# Altium PCB PCB1.PcbDoc
Units mm, origin at the board's own origin, x right, y up, seen from the top; angles counter-clockwise.
Board outline 71.12 x 58.42 mm, 2 copper layers (Top Layer, Bottom Layer); 35 components, 34 nets, 153 pads, 108 vias.
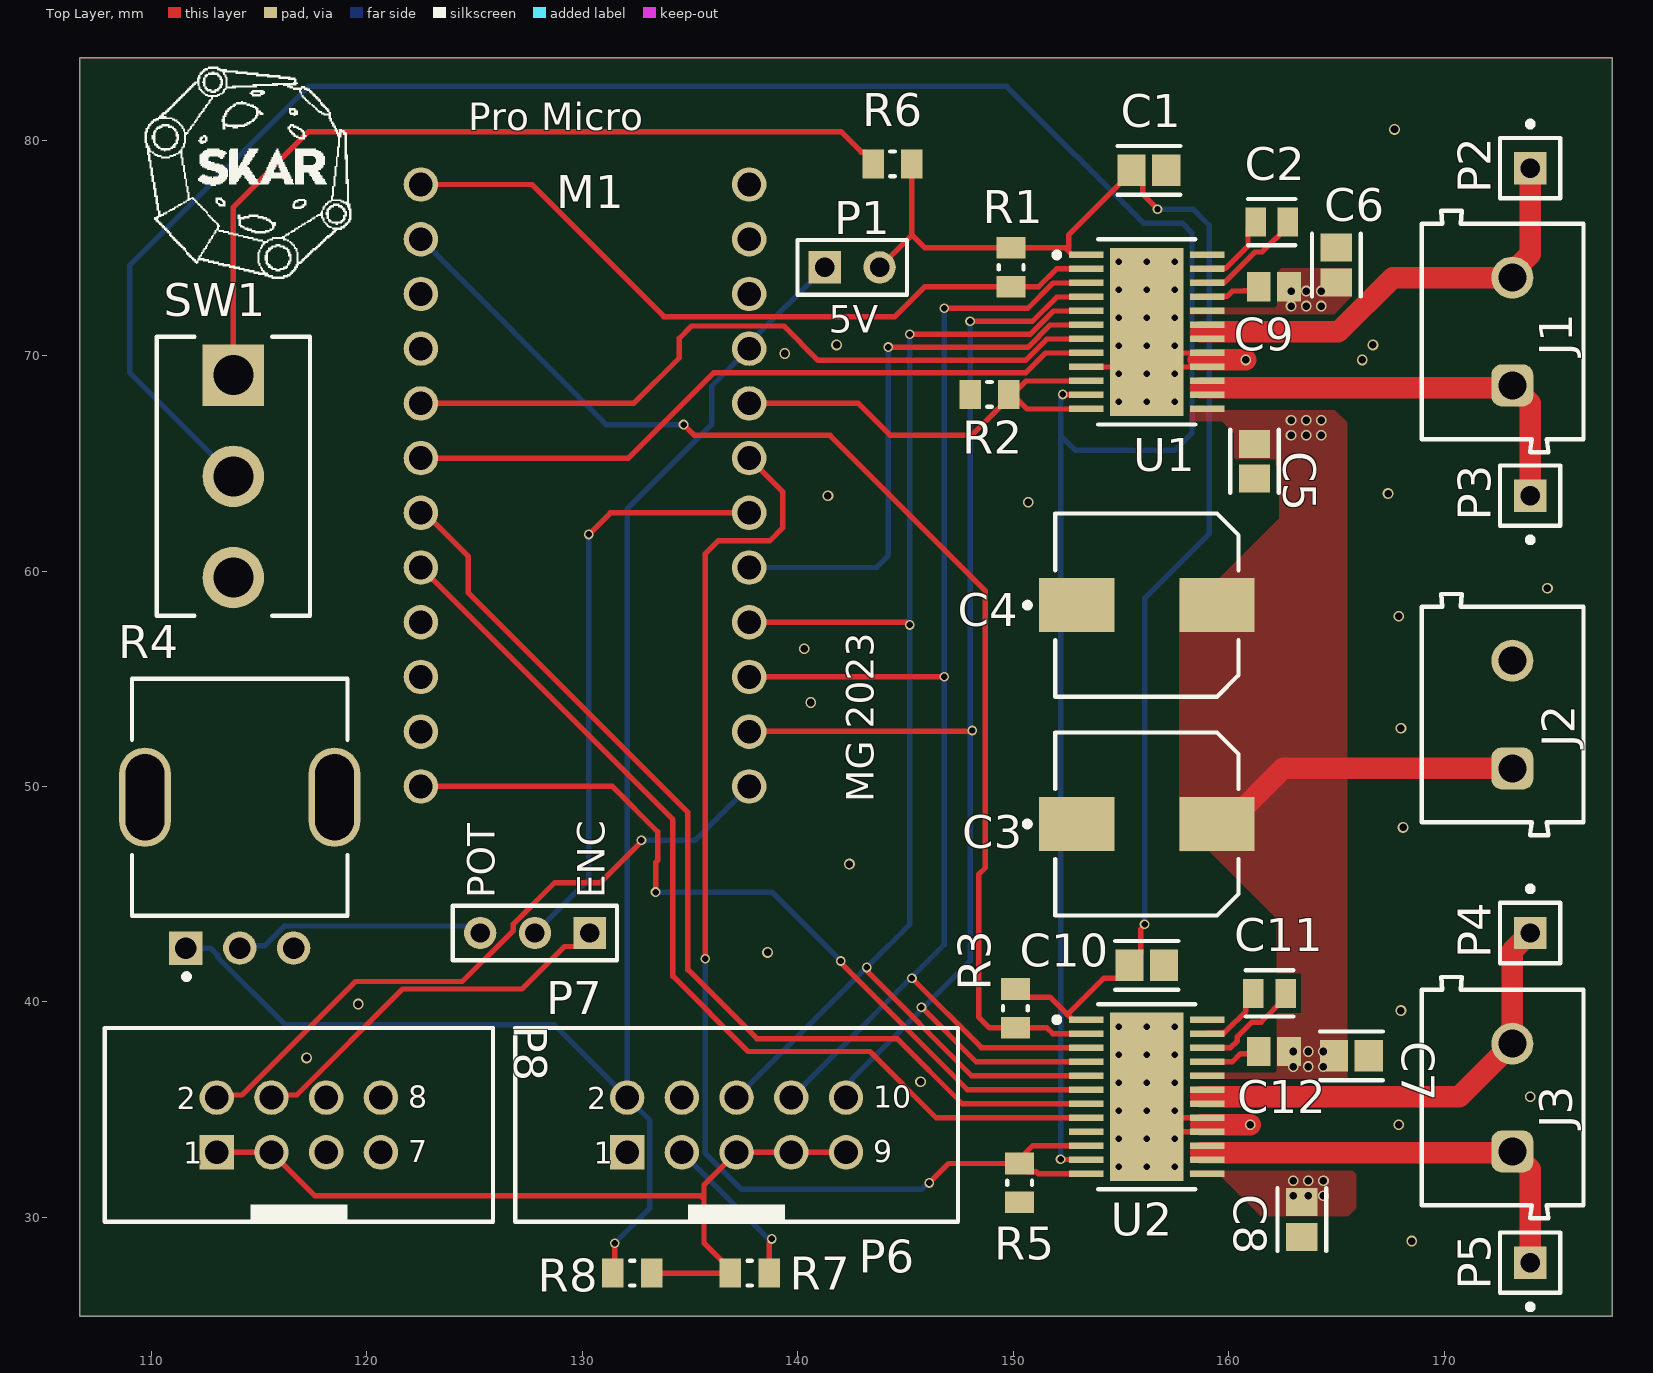
[diagram p0: Top Layer view]
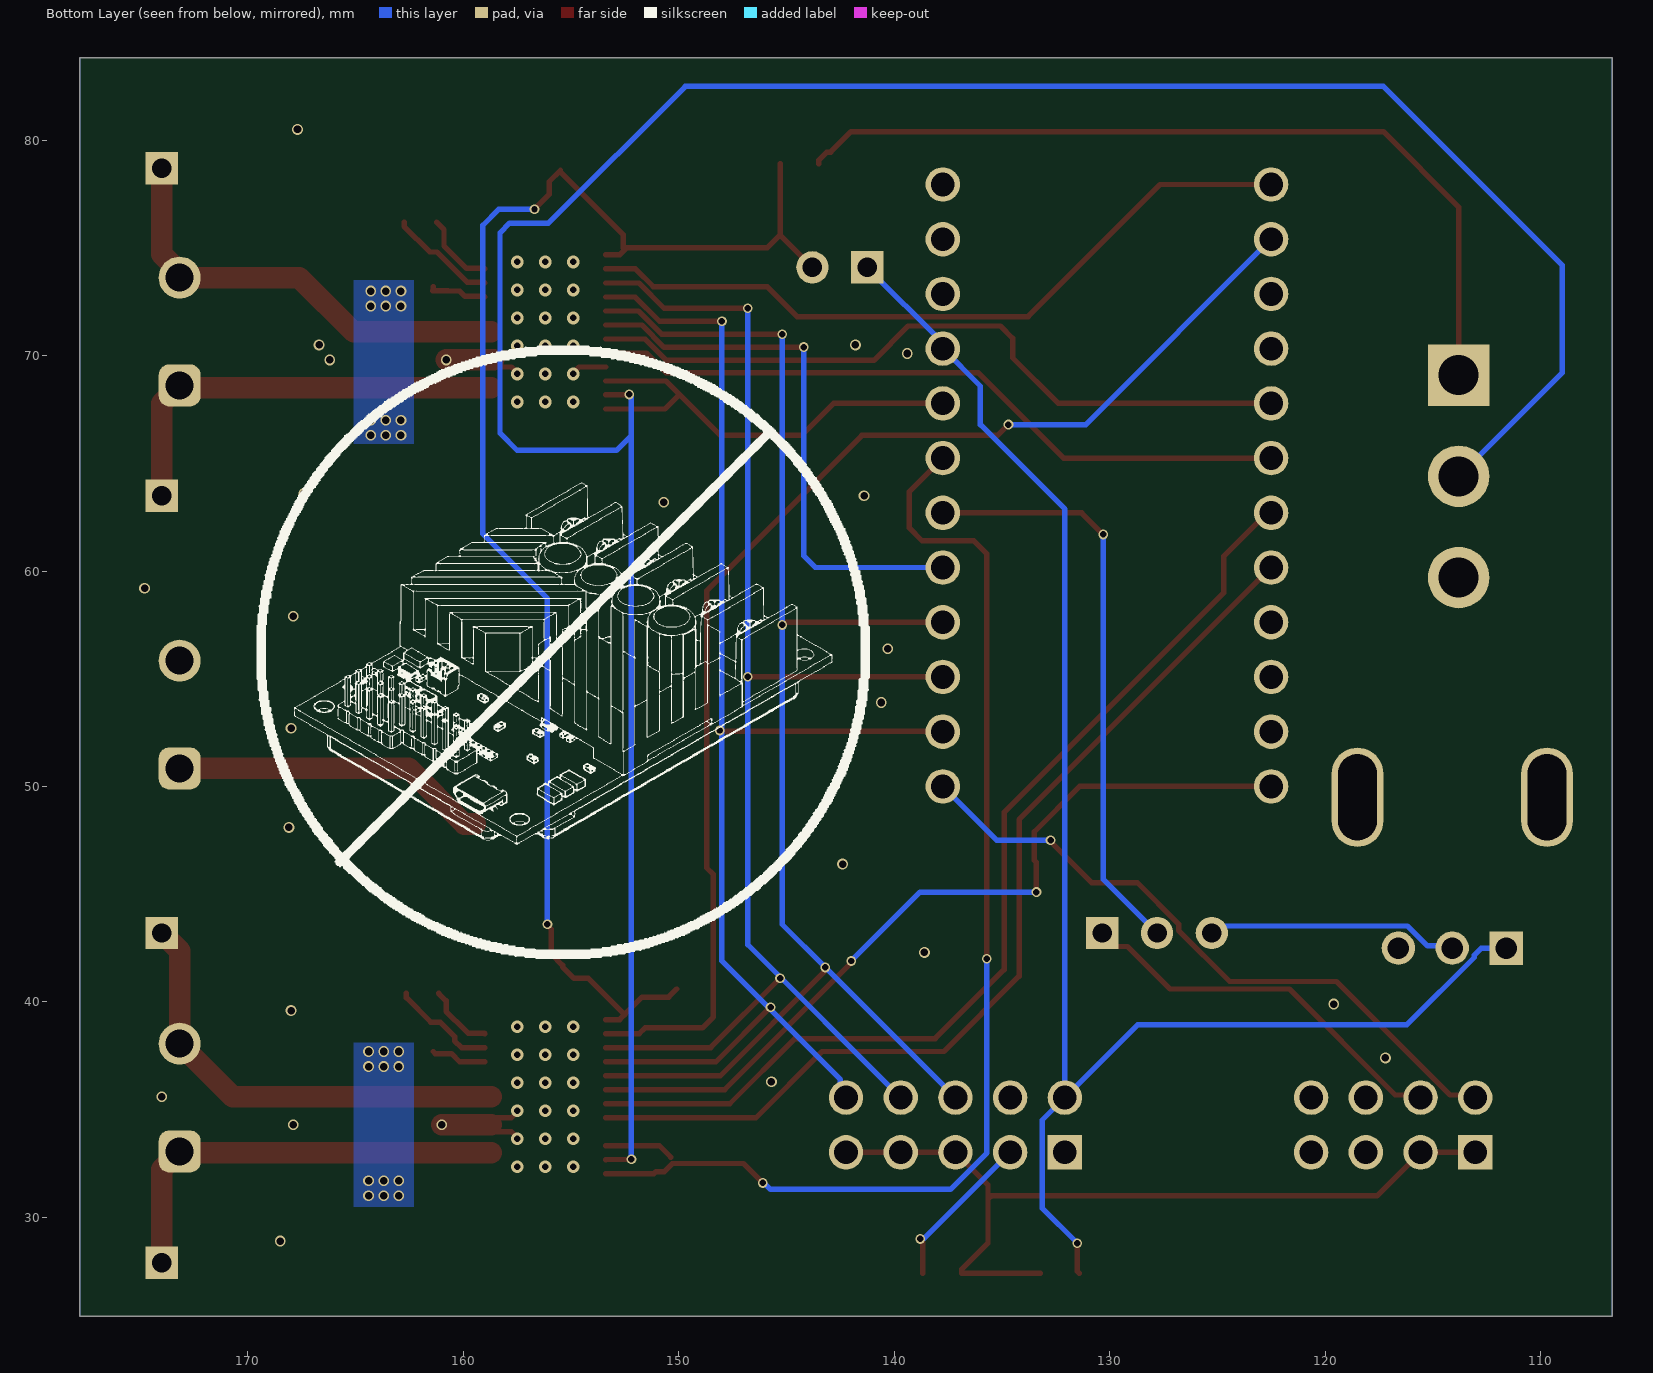
[diagram p1: Bottom Layer view, seen from below]
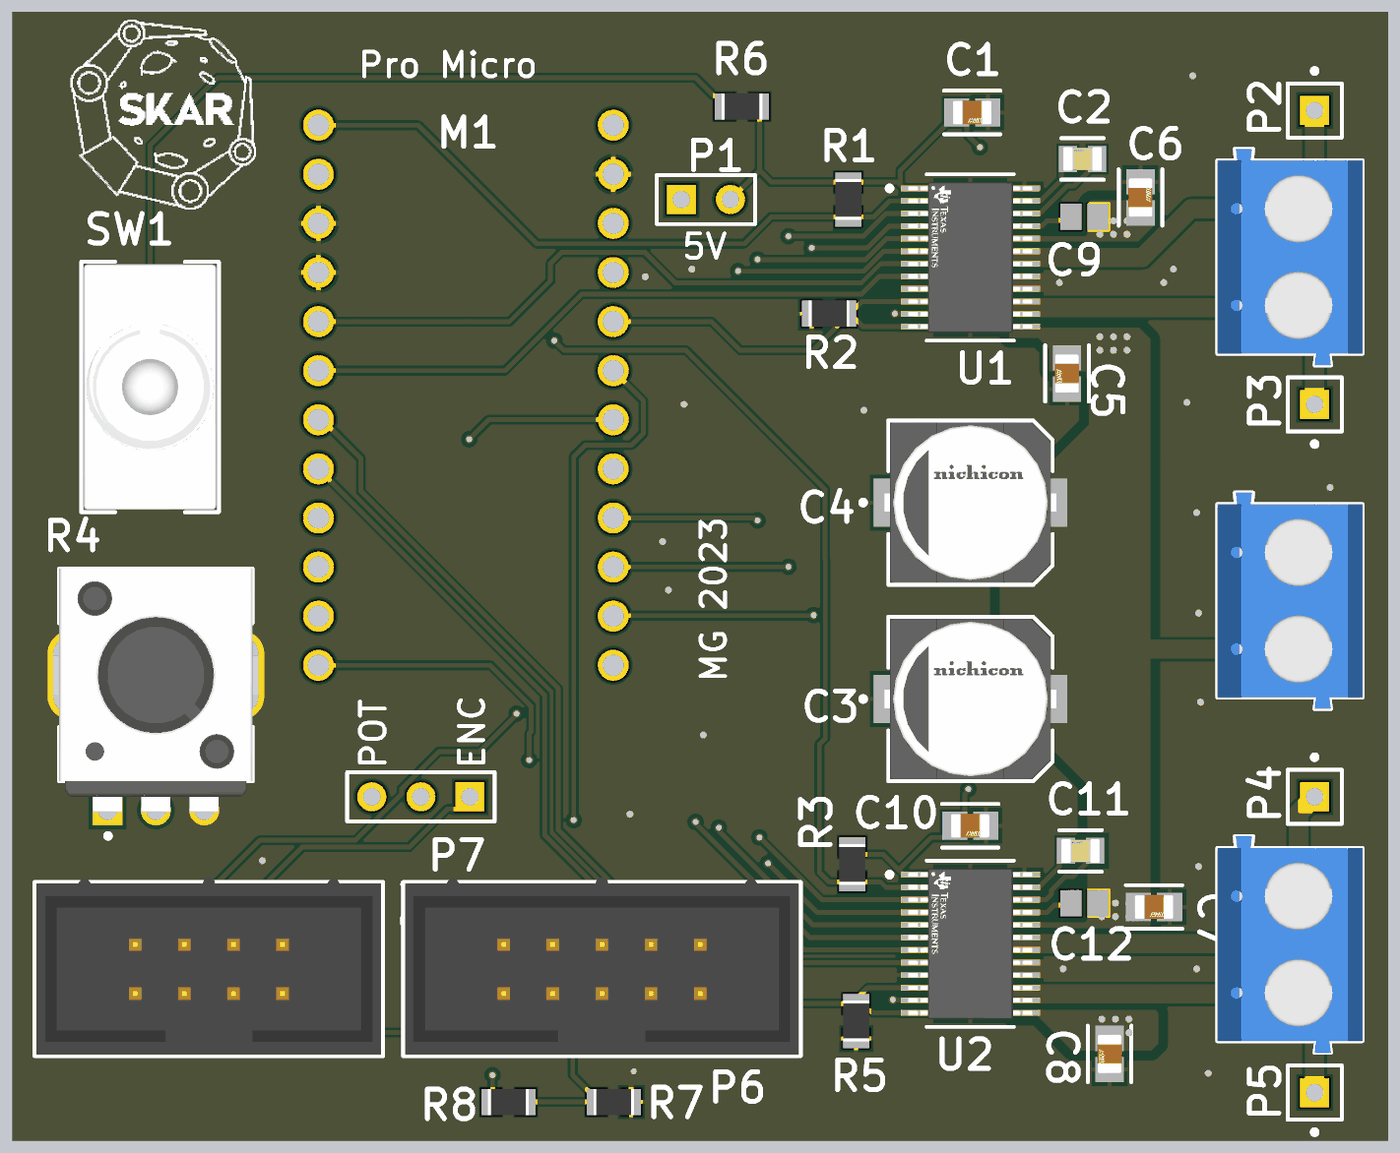
[diagram p2: 3D render of the assembled board from above, using the file's embedded part models]

## Layer stack, top to bottom
Top Solder: solder mask 0.0102, Solder Resist, Dk 3.5
Top Layer: signal copper 0.0356
Dielectric 1: dielectric 0.32, FR-4, Dk 4.8
Bottom Layer: signal copper 0.0356
Bottom Solder: solder mask 0.0102, Solder Resist, Dk 3.5

## Board outline
106.68,25.4 106.68,83.82 177.8,83.82 177.8,25.4

## Design rules (kind name [scope] priority, off if disabled: settings)
Clearance Clearance_POWER [(InNet('NetC205_2') OR InNet('NETC203_2') OR InNet('NETC206_2') OR InNet('NetP410_1') OR InNet('NetP410_3') OR InNet('VM'))] p1: gap=0.254 ignorepadtopadclearanceinfootprint=FALSE except(0: SMDPad-Hole THPad-Hole Via-Hole Fill-Hole Poly-Hole Region-Hole Text-Hole; 0.1: Arc-Arc Arc-Track Track-Track; 0.127: Arc-THPad Arc-Fill Arc-Poly Arc-Region Track-THPad Track-Fill Track-Poly Track-Region SMDPad-SMDPad; 0.2: Arc-SMDPad Track-SMDPad; 0.5: THPad-THPad THPad-Fill THPad-Poly THPad-Region Fill-Fill Fill-Poly Fill-Region Poly-Poly Poly-Region Region-Region)
Clearance [All] p2: gap=0.127 ignorepadtopadclearanceinfootprint=FALSE except(0: SMDPad-Hole THPad-Hole Via-Hole Fill-Hole Poly-Hole Region-Hole Text-Hole; 0.1: Arc-Arc Arc-Track Track-Track; 0.2: Arc-SMDPad Track-SMDPad THPad-Fill THPad-Poly THPad-Region Via-Fill Via-Poly Via-Region; 0.254: Arc-Via Arc-Text Arc-Hole Track-Via Track-Text Track-Hole SMDPad-THPad SMDPad-Via SMDPad-Text THPad-Via THPad-Text Via-Via Via-Text Fill-Text Poly-Text Region-Text Text-Text; 0.5: THPad-THPad)
ComponentClearance [All] p1: gap=0.127 collisioncheckmode=3 verticalgap=0.254 showdistances=FALSE
HoleSize [All] p1: absolutevalues=TRUE maxlimit=6.5 minlimit=0.025 maxpercent=80.000 minpercent=20.000
MinimumSolderMaskSliver [All] p1: minsoldermaskwidth=0.08
PlaneClearance [All] p1: clearance=0.2
PlaneConnect [All] p1: planeconnectstyle=Direct reliefexpansion=0.508 reliefentries=4 reliefconductorwidth=0.254 reliefairgap=0.254
PolygonConnect PolygonConnect_GND_POWER [InNet('GND') vs (HasFootprint('FP-FC-G-MFG') OR HasFootprint('FP-CL32-IPC_B') OR HasFootprint('TSON Advance_TOS') OR HasFootprint('XT60+MR60') OR HasFootprint('XT-60') OR HasFootprint('FP-SMAJ-CA-MFG') OR InNamedPolygon('NONET_L01_P005'))] p1: connectstyle=Direct reliefconductorwidth=0.254 reliefentries=4 polygonreliefangle="90 Angle" airgapwidth=0.254
PolygonConnect PolygonConnect_GND [InNet('GND')] p2: thpad.connectstyle=Direct thpad.reliefconductorwidth=0.254 thpad.reliefentries=4 thpad.polygonreliefangle="90 Angle" thpad.airgapwidth=0.254 smdpad.connectstyle=Relief smdpad.reliefconductorwidth=0.2 smdpad.reliefentries=4 smdpad.polygonreliefangle="90 Angle" smdpad.airgapwidth=0.2 via.connectstyle=Direct via.reliefconductorwidth=0.254 via.reliefentries=4 via.polygonreliefangle="90 Angle" via.airgapwidth=0.254
PolygonConnect [All] p3: connectstyle=Direct reliefconductorwidth=0.254 reliefentries=4 polygonreliefangle="90 Angle" airgapwidth=0.254
RoutingVias [All] p1: holewidth=0.3 width=0.45 viastyle="Through Hole" minholewidth=0.3 minwidth=0.45 maxholewidth=0.55 maxwidth=0.7
SilkToSilkClearance [All] p1: silktosilkclearance=0
SilkToSolderMaskClearance [IsPad] p1: minsilkscreentomaskgap=0.15 clearancetoexposedcopper=TRUE
SolderMaskExpansion [All] p1: expansion=0.1 istentingtop=FALSE
Width Width_voltage [InNetClass('Voltage')] p1: maxlimit=0.5 minlimit=0.18 preferedwidth=0.18 minimp=50.000000 maximp=50.000000 favimp=50.000000
Width [All] p2: maxlimit=1 minlimit=0.127 preferedwidth=0.25 minimp=50.000000 maximp=50.000000 favimp=50.000000
23 further rules are at their usual default settings.

## Components (designator, comment, footprint, x,y, rotation, side; value= is the part's Value field where it differs from the comment)
C1 "100nF" FP-0805-L_2_01_0_2-W_1_25-IPC_B 156.3,78.6 r0 top
C2 "47nF" FP-C0805C-DN-MFG 162,76.2 r0 top value="47,000 pF"
C3 "220uF" FP-UWT1V221MNL1GS-MFG 156.21,48.26 r0 top
C4 "220uF" FP-UWT1V221MNL1GS-MFG 156.21,58.42 r0 top
C5 "100nF" FP-0805-L_2_01_0_2-W_1_25-IPC_B 161.2,65.1 r270 top
C6 "100nF" FP-0805-L_2_01_0_2-W_1_25-IPC_B 165,74.206 r90 top
C7 "100nF" FP-0805-L_2_01_0_2-W_1_25-IPC_B 165.7,37.5 r0 top
C8 "100nF" FP-0805-L_2_01_0_2-W_1_25-IPC_B 163.4,29.9 r270 top
C9 "1uF" CAPC2013X145X50LL20T25 162.1,73.2 r0 top
C10 "100nF" FP-0805-L_2_01_0_2-W_1_25-IPC_B 156.2,41.7 r0 top
C11 "47nF" FP-C0805C-DN-MFG 161.9,40.4 r0 top value="47,000 pF"
C12 "1uF" CAPC2013X145X50LL20T25 162.1,37.7 r0 top
J1 "OUT 1" 691102710002 172.72,71.12 r90 top
J2 "POWER" 691102710002 172.72,53.34 r90 top
J3 "OUT 2" 691102710002 172.72,35.56 r90 top
M1 "Arduino + CAN" PCBComponent_1 130.1,66.1 r0 top
P1 "Header 2" HDR1X2 141.26,74.1 r0 top
P2 "Plug" PIN1 174,78.7 r0 top
P3 "Plug" PIN1 174,63.5 r180 top
P4 "Plug" PIN1 174,43.2 r0 top
P5 "Plug" PIN1 174,27.9 r180 top
P6 "61201021621" 61201021621 137.16,34.29 r0 top
P7 "Header 3" HDR1X3 130.34,43.2 r180 top
P8 "61200821621" 61200821621 116.84,34.29 r0 top
R1 "10k" RESC2013X60X35NL10T20 149.9,74.1 r90 top
R2 "680" RESC2013X60X35NL10T20 148.9,68.2 r0 top
R3 "10k" RESC2013X60X35NL10T20 150.1,39.7 r90 top
R4 "PTV09A-4225F-B103" FP-PTV09A-4-MFG 114.1,49.5 r0 top
R5 "680" RESC2013X60X35NL10T20 150.3,31.6 r90 top
R6 "10k" RESC2013X60X35NL10T20 144.4,78.9 r0 top
R7 "10k" RESC2013X60X35NL10T20 137.77,27.41 r0 top
R8 "10k" RESC2013X60X35NL10T20 132.32,27.41 r0 top
SW1 "A101SYCB04" FP-A101SYCB04-MFG 113.8,64.4 r0 top
U1 "DRV8873SPWPRQ1" FP-PWP0024J-MFG 156.2,71.1 r0 top
U2 "DRV8873SPWPRQ1" FP-PWP0024J-MFG 156.2,35.6 r0 top

## Footprints (in the part's own frame and the unit in brackets; to place one, negate y for a bottom-side part, rotate by r counter-clockwise, add the part's x,y. Pads: shape width x height; smd on the part's side, far side on the other; paste and mask are expansions set on the pad)
61200821621 [mm] "8 pins, straight, gold plating"
  rect 1.6x1.6 hole 1.1: 1(-3.81,-1.27)
  round 1.6 hole 1.1: 2(-3.81,1.27) 3(-1.27,-1.27) 4(-1.27,1.27) 5(1.27,-1.27) 6(1.27,1.27) 7(3.81,-1.27) 8(3.81,1.27)
  silkscreen extent -9.01,-4.5 9.01,4.5, body extent -8.91,-4.42 8.91,4.75, height 9.13
61201021621 [mm] "10 pins, straight, gold plating"
  rect 1.6x1.6 hole 1.1: 1(-5.08,-1.27)
  round 1.6 hole 1.1: 2(-5.08,1.27) 3(-2.54,-1.27) 4(-2.54,1.27) 5(0,-1.27) 6(0,1.27) 7(2.54,-1.27) 8(2.54,1.27) 9(5.08,-1.27) 10(5.08,1.27)
  silkscreen extent -10.28,-4.5 10.28,4.5, body extent -10.18,-4.42 10.18,4.75, height 9.13
691102710002 [mm] "5,00mm - modular - blue - Horizontal entry with pressure clamp - 9,9 mm height - 02p"
  rrect50% 1.95x1.95 hole 1.3: 1(-2.5,-0.45)
  round 1.95 hole 1.3: 2(2.5,-0.45)
  silkscreen extent -5.6,-3.75 5.6,3.75, body extent -5.6,-3.75 5.6,3.75, height 9.96
CAPC2013X145X50LL20T25 [mm] "Chip Capacitor, 2-Leads, Body 2.00x1.25mm, IPC High Density"
  rect 1.1x1.35 smd: 1(-0.7,0) 2(0.7,0)
  body extent -1.1,-0.72 1.1,0.72, height 1.45
FP-0805-L_2_01_0_2-W_1_25-IPC_B [mm]
  rect 1.305x1.456 smd paste+0 mask+0: 1(-0.806,0) 2(0.806,0)
  silkscreen extent -1.46,-1.13 1.46,1.13, body extent -1.71,-0.98 1.71,0.98, height 0.25
FP-A101SYCB04-MFG [mil]
  rect 112.37x112.37 hole 73 paste-99999 mask+0: 1(0,185)
  round 112.37 hole 73 paste-99999 mask+0: 2(0,0) 3(0,-185)
  silkscreen extent -140,-255 140,255, body extent -144,-259 144,259, height 10
FP-C0805C-DN-MFG [mm]
  rect 0.95x1.35 smd paste+0 mask+0: 1(-0.75,0) 2(0.75,0)
  silkscreen extent -1.1,-1.07 1.1,1.07, body extent -1.4,-0.85 1.4,0.85, height 0.25
FP-PTV09A-4-MFG [mm]
  rect 1.55x1.55 hole 1 paste-2539.97 mask+0: 1(-2.5,-7)
  round 1.55 hole 1 paste-2539.97 mask+0: 2(0,-7) 3(2.5,-7)
  rrect100% 2.4x4.6 hole 4 slot 1.8 at 0 deg paste-2539.97 mask+0: 4(-4.4,0) 5(4.4,0)
  silkscreen extent -5,-8.45 5,5.5, body extent -5.8,-7.88 5.8,5.6, height 0.25
FP-PWP0024J-MFG [mm]
  rect 1.6x0.3 smd paste-1000 mask+0: 1(-2.8,3.575) 2(-2.8,2.925) 3(-2.8,2.275) 4(-2.8,1.625) 5(-2.8,0.975) 6(-2.8,0.325) 7(-2.8,-0.325) 8(-2.8,-0.975) 9(-2.8,-1.625) 10(-2.8,-2.275) 11(-2.8,-2.925) 12(-2.8,-3.575) 13(2.8,-3.575) 14(2.8,-2.925) 15(2.8,-2.275) 16(2.8,-1.625) 17(2.8,-0.975) 18(2.8,-0.325) 19(2.8,0.325) 20(2.8,0.975) 21(2.8,1.625) 22(2.8,2.275) 23(2.8,2.925) 24(2.8,3.575)
  rect 3.4x7.8 smd paste-1000 mask-1000: 25(0,0)
  silkscreen extent -4.3,-4.3 2.25,4.3, body extent -3.7,-4.2 3.7,4.2, height 0.25
FP-UWT1V221MNL1GS-MFG [mm]
  rect 3.5x2.5 smd paste+0 mask+0: 1(-3.25,0) 2(3.25,0)
  silkscreen extent -5.67,-4.25 4.25,4.25, body extent -5.25,-4.5 5.25,4.5, height 0.25
HDR1X2 [mm] "Connector; Header; 2 Position"
  rect 1.5x1.5 hole 0.9: 1(0,0)
  round 1.5 hole 0.9: 2(2.54,0)
  silkscreen extent -1.27,-1.27 3.81,1.27
HDR1X3 [mm] "Connector; Header; 3 Position"
  rect 1.5x1.5 hole 0.9: 1(0,0)
  round 1.5 hole 0.9: 2(2.54,0) 3(5.08,0)
  silkscreen extent -1.27,-1.27 6.35,1.27
PCBComponent_1 [mm]
  round 1.6 hole 1.1 paste-2539.97: 1(-7.595,11.845) 2(-7.595,9.305) 3(-7.595,6.765) 4(-7.595,4.225) 5(-7.595,1.685) 6(-7.595,-0.855) 7(-7.595,-3.395) 8(-7.595,-5.935) 9(-7.595,-8.475) 10(-7.595,-11.015) 11(-7.595,-13.555) 12(-7.595,-16.095) 13(7.645,-16.095) 14(7.645,-13.555) 15(7.645,-11.015) 16(7.645,-8.475) 17(7.645,-5.935) 18(7.645,-3.395) 19(7.645,-0.855) 20(7.645,1.685) 21(7.645,4.225) 22(7.645,6.765) 23(7.645,9.305) 24(7.645,11.845)
PIN1 [mm] "Connector; Plug"
  rect 1.5x1.5 hole 0.9: 1(0,0)
  silkscreen extent -1.4,-1.4 1.4,2.17
RESC2013X60X35NL10T20 [mm] "Chip Resistor, 2-Leads, Body 2.1x1.35mm, IPC Medium Density"
  rect 1x1.35 smd: 1(-0.9,0) 2(0.9,0)
  silkscreen extent -0.1,-0.58 0.1,0.57, body extent -1.05,-0.68 1.05,0.67, height 0.6

## Part data
C1 C5 C6 C7 C8 C10: library part CMP-2007-04174-2, "General Purpose Ceramic Capacitor, 0805, 100nF, 10%, X7R, 15%, 100V", Case Code (Imperial)=0805, Case Code (Metric)=2012, Dielectric=X7R, Dielectric Material=Ceramic, Max Operating Temperature=125°C, Min Operating Temperature=-55°C, Package Quantity=2000, Tolerance=10%, Voltage=100V, Capacitance=100nF, Case/Package=0805, Construction=Flat, Contact Plating=Tin, Depth=1.25mm, Height=1.4mm, Lead Free="Lead Free", Length=2.01mm, Mount="Surface Mount", Number of Pins=2, Packaging="Tape and Reel", Radiation Hardening=No, REACH SVHC="No SVHC", RoHS Compliant=Yes, Series=-, Termination=SMD/SMT, Thickness=0.055inch, Voltage Rating=100V, Voltage Rating (DC)=100V, Width=0.049inch
C2 C11: library part CMP-2007-01098-2, "CAP CER 0.047UF 50V X7R 0805", Capacitance="47,000 pF", Manufacturer=KEMET, Manufacturer Part Number=C0805C473K5RACTU, Package=C0805C-DN, Temperature="-55°C to +125°C", Temperature Characteristic=X7R, Temperature Coefficient=30ppm/°C, Temperature Range High=+125°C, Temperature Range Low=-55°C, Tolerance=0.1, Voltage Rating="50 V", Automotive=No, Category=Cap, ComponentLink2Description=Datasheet, ComponentLink2URL=https://content.kemet.com/datasheets/KEM_C1003_C0G_SMD.pdf, Device Class L1="Passive Components", Device Class L2=Capacitors, Device Class L3="Ceramic Capacitors", Digikey Description="CAP CER 0.047UF 50V X7R 0805", Height=0.88mm, Ipc Land Pattern Name=CAPC200125X78, Lead Free=Yes, Material=Ceramic, Mouser Description="Capacitor; Ceramic; Cap 0.047 uF; Tol 10%; Vol-Rtg 50 VDC; SMT; 0805; X7R; Tape&Reel", Octopart=https://octopart.com/c0805c473k5ractu-kemet-138387, RoHS=TRUE
C3 C4: library part CMP-12462-000057-1, "CAP ALUM 220UF 20% 35V SMD", Case/Package=Radial, Dielectric Material=Aluminium, Leakage Current=3uA, Max Operating Temperature=105°C, Min Operating Temperature=-55°C, Package Quantity=500, Ripple Current=190mA, Tolerance=20%, Voltage=35V, Capacitance=220uF, Construction=Cylindrical, Diameter=8mm, Dissipation Factor=0.14%, Height=10mm, Height - Seated (Max)=0.394inch, Lead Diameter=1.1mm, Lead Free="Lead Free", Lead Pitch=0.327inch, Length=10mm, Life (Hours)=1000Hour, Mount="Surface Mount", Number of Pins=2, Packaging="Tape and Reel", Radiation Hardening=No, REACH SVHC="No SVHC", Ripple Current (AC)=190mA, RoHS Compliant=Yes, Series=WT, Termination=SMD/SMT, Voltage Rating=35V, Voltage Rating (DC)=35V
C9 C12: library part CMP-1036-04746-2, Manufacturer=Kemet, Part Number=C0805C105K4PACTU
J1 J2 J3: library part CMP-1502-03258-2, Color=Blue, Current=15A, Max Operating Temperature=105°C, Min Operating Temperature=-40°C, Voltage=300V, Contact Material=Brass, Contact Plating=Tin, Current Rating=15A, Height=13.4mm, Housing Material=Nylon, Lead Pitch=5mm, Length=7.5mm, Mount="Through Hole", NexarPartId=8917706, Number of Contacts=2, Number of Levels=1, Number of Pins=2, Number of Positions Per Level=2, Packaging=Box, Pitch=5.0038mm, Plating=Steel, REACH SVHC=Unknown, RoHS=Compliant, Stripping Length=-6mm, Termination=Screw, Voltage Rating=300V, Width=11.2mm, Wire Gauge (Max)=22AWG, Wire Gauge (Min)=14AWG, Wire/Cable Gauge=22AWG
M1: library part Arduino, "Arduino Pro Micro + CAN Shield"
P1: "Header, 2-Pin", LatestRevisionDate=17-Jul-2002, LatestRevisionNote="Re-released for DXP Platform.", Publisher="Altium Limited"
P6: library part CMP-1502-00007-1, "Male Box Header WR-BHD, THT, Vertical, pitch 2.54 mm, 10 pins", Contact Resistance=20mOhm, Manufacturer="Wurth Elektronik", Operating Temperature=-40to125degC, Withstanding Voltage=500VAC, Working Voltage=250VAC, Datasheet URL=https://katalog.we-online.de/em/datasheet/6120xx21621.pdf, Gender=Male, Manufacturer URL=http://www.we-online.de, Mounting Technology=THT, Orientation=Vertical, Package Reference=61201021621, Packaging=Tray, Part Number=61201021621, Pin Number=10, Pitch=2.54mm, Published Date=August2018, Publisher=WurthElektronik
P7: "Header, 3-Pin", LatestRevisionDate=17-Jul-2002, LatestRevisionNote="Re-released for DXP Platform.", Publisher="Altium Limited"
P8: library part CMP-1502-00006-1, "Male Box Header WR-BHD, THT, Vertical, pitch 2.54 mm, 8 pins", Contact Resistance=20mOhm, Manufacturer="Wurth Elektronik", Operating Temperature=-40to125degC, Withstanding Voltage=500VAC, Working Voltage=250VAC, Datasheet URL=https://katalog.we-online.de/em/datasheet/6120xx21621.pdf, Gender=Male, Manufacturer URL=http://www.we-online.de, Mounting Technology=THT, Orientation=Vertical, Package Reference=61200821621, Packaging=Tray, Part Number=61200821621, Pin Number=8, Pitch=2.54mm, Published Date=August2018, Publisher=WurthElektronik
R1 R2 R3 R5 R6 R7 R8: library part CMP-1659-00013-4, "Chip Resistor, 10 KOhm, +/- 1%, 0.125 W, -55 to 155 degC, 0805 (2012 Metric), RoHS, Tape and Reel", Manufacturer=Yageo, Max Operating Temperature="155 degC", Min Operating Temperature="-55 degC", Package Quantity=5000, Voltage Rating="150 V", ComponentLink1Description="Manufacturer URL", ComponentLink1URL=http://www.yageo.com/, ComponentLink2Description=Datasheet, ComponentLink2URL=http://www.yageo.com/documents/recent/PYu-RC_Group_51_RoHS_L_04.pdf, DatasheetVersion="Rev. 4, 02/2016", Height="0.5 mm", Length="2 mm", Mount="Surface Mount", Mounting Technology="Surface Mount", PackageDescription="2-Pin Surface Mounted Device, Body 2 x 1.25 mm", PackageReference=0805, Packaging="Tape and Reel", Pins=2, REACH SVHC="No SVHC", RoHSCompliant=true
R4: library part CMP-07234-000052-1, "POT 10K OHM 1/20W CARBON LINEAR", Max Operating Temperature=50°C, Max Power Dissipation=50mW, Min Operating Temperature=-10°C, Package Quantity=100, Resistance=10kR, Resistance Tolerance=20%, Resistor Type=Carbon, Actuator Diameter=0.236inch, Actuator Length=0.984inch, Depth=12.5mm, Height=12.5mm, Hole Diameter=9.1mm, Length=11.4mm, Military Standard=Not, Mount="Through Hole", Number of Gangs=1, Number of Turns=1, Packaging=Bulk, Power Rating=50mW, Radiation Hardening=No, REACH SVHC="No SVHC", RoHS Compliant=Yes, Series="Pro Audio PTV09", Taper=Linear, Technology="CARBON FILM", Termination=PCB, Tolerance=20%, Type=Potentiometer
SW1: library part CMP-03408-000017-1, "SWITCH TOGGLE SPDT 0.4VA 20V", Actuator Color=Chrome, Contact Current Rating=400mA, Contact Resistance=10mR, Flammability Rating="UL94 V-1", Insulation Resistance=30MR, Max Operating Temperature=85°C, Max Voltage Rating (AC)=20V, Min Operating Temperature=-30°C, Package Quantity=100, Power Rating=400mW, Actuator Length=10.41mm, Actuator Material=Phenolic, Actuator Type="Standard Round", Contact Material=Copper, Contact Plating=Gold, Depth=6.86mm, Electrical Life=6000Cycles, ELV=Compliant, Illumination Type=Non-Illuminated, Lead Free="Lead Free", Max Voltage Rating (DC)=20V, Mount=Panel, Number of Poles=1, Number of Positions=2, Orientation=Straight, Packaging=Bulk, Radiation Hardening=No, REACH SVHC="No SVHC", RoHS Compliant=Yes, Series="Gemini A", Switch Function=On-On, Termination="PC Pins", Throw Configuration=SPDT, Voltage Rating (AC)=20V, Voltage Rating (DC)=20V
U1 U2: library part CMP-04915-000063-1, "IC MTRDRV UNIPLR 0-5.5V 24HTSSOP", Max Operating Temperature=125°C, Min Operating Temperature=-40°C, Output Current=10mA, Interface=SPI, Logic Function="AND GATE", Mount="Surface Mount", Packaging="Cut Tape", RoHS Compliant=Yes
P2 P3 P4 P5: LatestRevisionDate=17-Jul-2002, LatestRevisionNote="Re-released for DXP Platform.", Publisher="Altium Limited"

## Via types
v1: diameter 0.5, hole 0.35, Top Layer to Bottom Layer, tented both sides, 49 vias
v2: diameter 0.6, hole 0.3, Top Layer to Bottom Layer, 36 vias
v3: diameter 0.45, hole 0.3, Top Layer to Bottom Layer, tented both sides, 23 vias

## Nets (pads, with @x,y where several pads share a name; then routed paths per layer and width w, separated by ;. In a path a pad name is that pad's centre, name@x,y a point inside that pad or via, vN(x,y) a via of type N, cw(c..) or ccw(c..) an arc to the next point about the centre after c; other vN are vias at no path point)
+5: M1.21 P1.1 P6.2 R4.1 R8.1 | length 75.1
  Top Layer w0.25: R8.1 131.5,27.49 v3(131.5,28.8)
  Bottom Layer w0.25: R4.1 112.75,42.5 113.073,42.177 113.073,42.075 116.201,38.946 128.694,38.946 P6.2 ; v3(131.5,28.8) 133.132,30.432 133.132,34.508 P6.2 ; P1.1 137.745,70.585 M1.21 136,68.58 136,66.8 132.08,62.88 P6.2
CS1: M1.17 U1.6 | length 26
  Top Layer w0.25: v3(144.2,70.4) 144.212,70.388 150.678,70.388 151.715,71.425 U1.6
  Bottom Layer w0.25: M1.17 143.665,60.165 144.2,60.7 v3(144.2,70.4)
CS2: M1.12 U2.6 | length 38.5
  Top Layer w0.25: M1.12 131.395,50.005 133.5,47.9 133.5,46.577 133.4,46.477 v3(133.4,45.1) ; v3@142,41.8 147.875,35.925 U2.6
  Bottom Layer w0.25: v3(133.4,45.1) 138.8,45.1 v3(142,41.9)
CS3: M1.13 P8.2 | length 30.9
  Top Layer w0.25: P8.2 113.153,35.683 114.205,35.683 119.472,40.95 124.427,40.95 126.798,43.321 126.798,43.615 128.721,45.538 130.838,45.538 132.746,47.446 v3(132.746,47.5)
  Bottom Layer w0.25: v3(132.746,47.5) 135.24,47.5 M1.13
CS4: P7.1 P8.4 | length 17.9
  Top Layer w0.25: P8.4 115.693,35.683 116.745,35.683 121.662,40.6 127.2,40.6 129.175,42.575 129.715,42.575 P7.1
GND: C1.2 C3.1 C4.1 C5.2 C6.2 C7.2 C8.2 C10.2 J2.2 M1.3 M1.4 M1.23 P6.3 R2.1 R4.3 R4.4 R4.5 R5.1 R7.2 SW1.3 U1.9 U1.16 U1.17 U1.24 U1.25 U2.9 U2.16 U2.17 U2.24 U2.25 | length 19.3
  Top Layer w0.25: R7.2 138.67,28.816 138.8,28.946 v3(138.8,29) ; U1.9 154.625,69.475 154.9,69.2 v2(154.9,69.15) ; v2(157.5,33.65) 157.5,33.7 157.775,33.975 U2.16 ; v2(157.5,34.95) 157.5,34.9 157.775,34.625 U2.17 ; v2(157.5,69.15) 157.5,69.2 157.775,69.475 U1.16@158.6,69.475 ; v2(157.5,70.45) 157.5,70.4 157.775,70.125 U1.17@158.6,70.125
  Top Layer w1: 158.6,69.8 v1(160.8,69.8) ; 158.7,34.3 v1(161,34.3)
  Bottom Layer w0.25: P6.3 v3@138.602,29.038
  other v1: 168.5,28.9 167.9,34.3 174,35.6 145.7,36.3 117.2,37.4 168,39.6 119.6,39.9 138.6,42.3 142.4,46.4 168.1,48.1 168,52.7 140.6,53.9 140.3,56.4 167.9,57.9 174.8,59.2 150.7,63.2 141.4,63.5 167.4,63.6 166.2,69.8 139.4,70.1 141.8,70.5 166.7,70.5 167.7,80.5
  other v2: 154.9,32.35 156.2,32.35 157.5,32.35 154.9,33.65 156.2,33.65 154.9,34.95 156.2,34.95 154.9,36.25 156.2,36.25 157.5,36.25 154.9,37.55 156.2,37.55 157.5,37.55 154.9,38.85 156.2,38.85 157.5,38.85 154.9,67.85 156.2,67.85 157.5,67.85 156.2,69.15 154.9,70.45 156.2,70.45 154.9,71.75 156.2,71.75 157.5,71.75 154.9,73.05 156.2,73.05 157.5,73.05 154.9,74.35 156.2,74.35 157.5,74.35
I1: M1.20 R2.2 U1.10 U1.12 | length 21
  Top Layer w0.25: M1.20 142.815,67.785 144.3,66.3 148.075,66.3 R2.2@149.975,68.2 ; U1.12 150.65,67.525 R2.2@149.975,68.2 ; U1.10 150.6,68.825 R2.2@149.975,68.2
I2: M1.19 R5.2 U2.10 U2.12 | length 58.1
  Top Layer w0.25: v3(135.7,42) 135.7,60.8 136.3,61.4 138.7,61.4 139.3,62 139.3,63.69 M1.19 ; v3(146.1,31.6) 147,32.5 R5.2 150.675,32.125 151.05,32.125 151.15,32.025 U2.12 ; R5.2@150.375,32.8 150.9,33.325 U2.10
  Bottom Layer w0.25: v3(135.7,42) 135.7,32.992 137.392,31.3 145.746,31.3 146.046,31.6 v3(146.1,31.6)
IN1.1: M1.5 U1.7 | length 34
  Top Layer w0.25: M1.5 132.385,67.785 134.5,69.9 134.5,70.8 135.077,71.377 139.354,71.377 140.947,69.784 150.569,69.784 151.56,70.775 U1.7
IN1.2: M1.6 U1.8 | length 32.9
  Top Layer w0.25: M1.6 132.145,65.245 136.1,69.2 150.575,69.2 151.5,70.125 U1.8
IN2.1: M1.7 U2.7 | length 47.5
  Top Layer w0.25: M1.7 122.695,62.705 124.7,60.7 124.7,59 134.9,48.8 134.9,41.5 138.1,38.3 144.611,38.3 147.636,35.275 U2.7
IN2.2: M1.8 U2.8 | length 45.7
  Top Layer w0.25: M1.8 134.2,48.47 134.2,41.2 137.7,37.7 143.352,37.7 146.427,34.625 U2.8
MISO: M1.15 P6.8 U1.3 U2.3 | length 65.2
  Top Layer w0.25: M1.15 137.753,55.092 146.792,55.092 v3(146.8,55.1) ; v3(145.3,41.1) 148.525,37.875 U2.3 ; v3(146.8,72.2) 150.683,72.2 151.858,73.375 U1.3
  Bottom Layer w0.25: P6.8 146.8,42.66 v3(146.8,55.1) v3(146.8,72.2)
MOSI: M1.14 P6.10 U1.4 U2.4 | length 63.4
  Top Layer w0.25: M1.14 137.773,52.572 148.072,52.572 v3(148.1,52.6) ; v3(145.743,39.757) 148.275,37.225 U2.4 ; v3(148,71.596) 150.896,71.596 152.025,72.725 U1.4
  Bottom Layer w0.25: P6.10 142.498,35.818 142.498,36.398 148,41.9 v3(148,71.596)
NetC1_1: C1.1 C10.1 P1.2 R1.2 R3.2 R6.2 U1.1 U2.1 | length 67.4
  Top Layer w0.25: P1.2 145.3,75.6 ; R6.2 145.3,75.6 ; R3.2 150.475,40.225 151.7,40.225 152.512,39.412 ; 152.588,75 152.588,75.617 155.494,78.524 C1.1 156.022,78.073 156.022,77.478 v3(156.7,76.8) ; U2.1 152.75,39.175 152.512,39.412 ; U1.1 152.75,74.675 152.425,75 R1.2 145.9,75 145.3,75.6 ; v3(156.1,43.6) 156.1,43.546 155.922,43.367 155.922,42.227 C10.1 155.394,41.624 154.867,41.097 154.197,41.097 152.512,39.412
  Bottom Layer w0.25: v3(156.1,43.6) 156.1,58.727 159.1,61.727 159.1,76.054 158.354,76.8 v3(156.7,76.8)
NetC2_1: C2.1 U1.23 | length 3.6
  Top Layer w0.25: U1.23 159.025,74.05 159.85,74.05 160.9,75.1 160.9,75.85 C2.1
NetC2_2: C2.2 U1.22 | length 5
  Top Layer w0.25: U1.22 159.025,73.4 159.815,73.4 161.225,74.81 161.56,74.81 162.75,76 C2.2
NetC9_1: C9.1 U1.21 | length 2.7
  Top Layer w0.25: U1.21 159.025,72.75 159.925,72.75 160.175,73 160.7,73 160.721,73.021 161.421,73.021 161.4,73.043 C9.1
NetC11_1: C11.1 U2.23 | length 3.2
  Top Layer w0.25: U2.23 159.025,38.55 159.788,38.55 159.935,38.696 159.935,38.7 160.8,39.565 160.8,40.05 C11.1
NetC11_2: C11.2 U2.22 | length 4.9
  Top Layer w0.25: U2.22 160.09,37.875 160.403,38.188 160.403,38.388 161.08,39.065 161.515,39.065 162.65,40.2 C11.2
NetC12_1: C12.1 U2.21 | length 2.6
  Top Layer w0.25: U2.21 160.175,37.225 160.55,37.6 161.3,37.6 C12.1
NetJ1_1: J1.1 P3.1 U1.14 U1.15 | length 20
  Top Layer w1: 158.7,68.5 173.05,68.5 J1.1 174,67.79 P3.1
NetJ1_2: J1.2 P2.1 U1.18 U1.19 | length 20.9
  Top Layer w1: 158.7,71.1 165.096,71.1 167.616,73.62 J1.2 173.17,73.877 174,74.707 P2.1
NetJ3_1: J3.1 P5.1 U2.14 U2.15 | length 20
  Top Layer w1: 158.7,33 173.11,33 J3.1 174,32.23 P5.1
NetJ3_2: J3.2 P4.1 U2.18 U2.19 | length 21
  Top Layer w1: 158.7,35.6 170.71,35.6 J3.2 173.17,42.37 P4.1
NetM1_18: M1.18 P7.2 | length 27.4
  Top Layer w0.25: v3(130.3,61.7) 131.305,62.705 M1.18
  Bottom Layer w0.25: P7.2 130.3,45.7 v3(130.3,61.7)
NetP6_5: P6.5 P6.7 P6.9 P8.1 P8.3 R7.1 R8.2 | length 39
  Top Layer w0.25: P8.1 P8.3 117.59,31 135.495,31 135.647,30.847 ; R8.2 R7.1 136.87,27.585 135.647,28.807 135.647,30.847 ; P6.9 P6.7 P6.5 135.647,31.507 135.647,30.847
NetP7_3: P7.3 R4.2 | length 11.7
  Bottom Layer w0.25: R4.2 114.202,42.602 115.25,42.602 116.175,43.527 124.595,43.527 124.922,43.2 P7.3
NetR6_1: R6.1 SW1.1 | length 39.7
  Top Layer w0.25: SW1.1 113.8,76.9 117.3,80.4 142,80.4 142.95,79.45 143.125,79.45 143.5,79.075 R6.1
NetSW1_2: SW1.2 U1.11 U2.11 | length 121.2
  Top Layer w0.25: v3(152.2,32.7) 152.212,32.688 153.388,32.688 U2.11 ; v3(152.3,68.2) 152.312,68.188 153.388,68.188 U1.11
  Bottom Layer w0.25: SW1.2 109,69.2 109,74.2 117.3,82.5 149.7,82.5 156.05,76.15 157.85,76.15 158.3,75.7 158.3,66.4 157.5,65.6 152.9,65.6 152.2,66.3 ; v3(152.2,32.7) 152.2,66.3 ; v3(152.3,68.2) 152.3,68.146 152.2,68.046 152.2,66.3
nFAULT1: M1.1 R1.1 U1.2 | length 34.4
  Top Layer w0.25: M1.1 127.655,77.945 133.787,71.813 144.513,71.813 145.9,73.2 R1.1 151.187,73.2 152.013,74.025 U1.2
nFAULT2: M1.2 R3.1 U2.2 | length 58.2
  Top Layer w0.25: v3(134.7,66.8) 135.2,66.3 141.5,66.3 148.7,59.1 148.7,55.5 148.704,55.496 148.704,46.227 148.4,45.923 148.4,39.3 148.9,38.8 R3.1 151.562,38.8 151.838,38.525 U2.2
  Bottom Layer w0.25: M1.2 131.11,66.8 v3(134.7,66.8)
SCLK: M1.16 P6.6 U1.5 U2.5 | length 67.3
  Top Layer w0.25: M1.16 145.021,57.625 145.146,57.5 v3(145.2,57.5) ; v3(143.2,41.6) 143.238,41.562 143.238,41.408 148.071,36.575 U2.5 ; v3(145.2,71) 145.208,70.992 150.787,70.992 151.87,72.075 U1.5
  Bottom Layer w0.25: P6.6 v3(143.2,41.6) 145.2,43.6 v3(145.2,57.5) v3(145.2,71)
VM: C3.2 C4.2 C5.1 C6.1 C7.1 C8.1 C9.2 C12.2 J2.1 U1.13 U1.20 U2.13 U2.20 | length 14.8
  Top Layer w1: C3.2 159.96,48.26 162.54,50.84 J2.1
  other v1: 163,31 163.7,31 164.4,31 163,31.7 163.7,31.7 164.4,31.7 163,37 163.7,37 164.4,37 163,37.7 163.7,37.7 164.4,37.7 162.9,66.3 163.6,66.3 164.3,66.3 162.9,67 163.6,67 164.3,67 162.9,72.3 163.6,72.3 164.3,72.3 162.9,73 163.6,73 164.3,73
pads on no net: M1.9 M1.10 M1.11 M1.22 M1.24 P6.1 P6.4 P8.5 P8.6 P8.7 P8.8

## Polygon pours and split planes (outlines as drawn)
GND on Top Layer "NONET_L01_P005" (solid, remove dead copper, shelved, pour order 5): 177.8,25.4 106.68,25.4 106.68,83.82 177.8,83.82
VM on Top Layer "VM_L01_P000" (solid, pour order 0): 165.5,48 165.5,36.4 158.202,36.426 158.214,36.717 162.146,36.717 162.246,36.817 162.246,48
VM on Top Layer "VM_L01_P004" (solid, pour order 4): 158.202,32.169 165.751,32.169 165.922,31.999 165.922,30.425 165.555,30.058 161.486,30.058 159.667,31.877 158.197,31.877
VM on Top Layer "VM_L01_P003" (solid, pour order 3): 159.1,47 162.3,43.8 162.3,43.4 165.1,43.4 165.5,43.8 165.5,47.8 165.5,66.9 164.924,67.476 158.2,67.476 158.205,67.455 158.205,66.947 158.204,66.946 159.69,66.946 160.27,66.366 160.27,65.254 160.472,65.051 162.049,65.051 162.34,64.76 162.34,62.449 159.36,59.469 157.714,59.469 157.714,47
VM on Top Layer "VM_L01_P002" (solid, pour order 2): 159.649,72.214 162.138,72.214 162.256,72.333 162.256,73.868 162.441,74.052 165.724,74.052 165.724,72.75 164.901,71.927 158.196,71.927 158.196,72.225
GND on Bottom Layer "NONET_L02_P007" (solid, remove dead copper, shelved, pour order 7): 177.8,25.4 106.68,25.4 106.68,83.82 177.8,83.82
VM on Bottom Layer "VM_L02_P006" (solid, pour order 6): 162.3,73.5 162.3,65.9 165.1,65.9 165.1,73.5
VM on Bottom Layer "VM_L02_P001" (solid, pour order 1): 162.3,38.1 162.3,30.5 165.1,30.5 165.1,38.1

## Silkscreen, mask and mechanical layers (free items; w line width, h text height)
Top Overlay:
  drawing of 16 lines, arcs and shapes, not listed
  text "5V" at 141.442,71.065 h1.27
  text "MG 2023" at 143.535,49.268 h1.27 r90
  text "POT" at 125.935,44.807 h1.27 r90
  text "ENC" at 131.035,44.807 h1.27 r90
Bottom Overlay:
  drawing of 9 lines, arcs and shapes, not listed
Mechanical 1:
  the board outline again, w0.2

## Text inside footprints (layer, text, board x,y; h text height)
M1: Top Overlay "Pro Micro" at 124.704,80.465 h1.27
P6: Top Overlay "9" at 143.5,32.55 h1.02; Top Overlay "10" at 143.5,35.09 h1.02; Top Overlay "2" at 130.22,35.03 h1.02; Top Overlay "1" at 130.52,32.49 h1.02
P8: Top Overlay "8" at 121.91,35.09 h1.02; Top Overlay "7" at 121.91,32.55 h1.02; Top Overlay "2" at 111.17,35.03 h1.02; Top Overlay "1" at 111.47,32.49 h1.02